# EAGLE board MegaShieldDB (EAGLE 6.4)
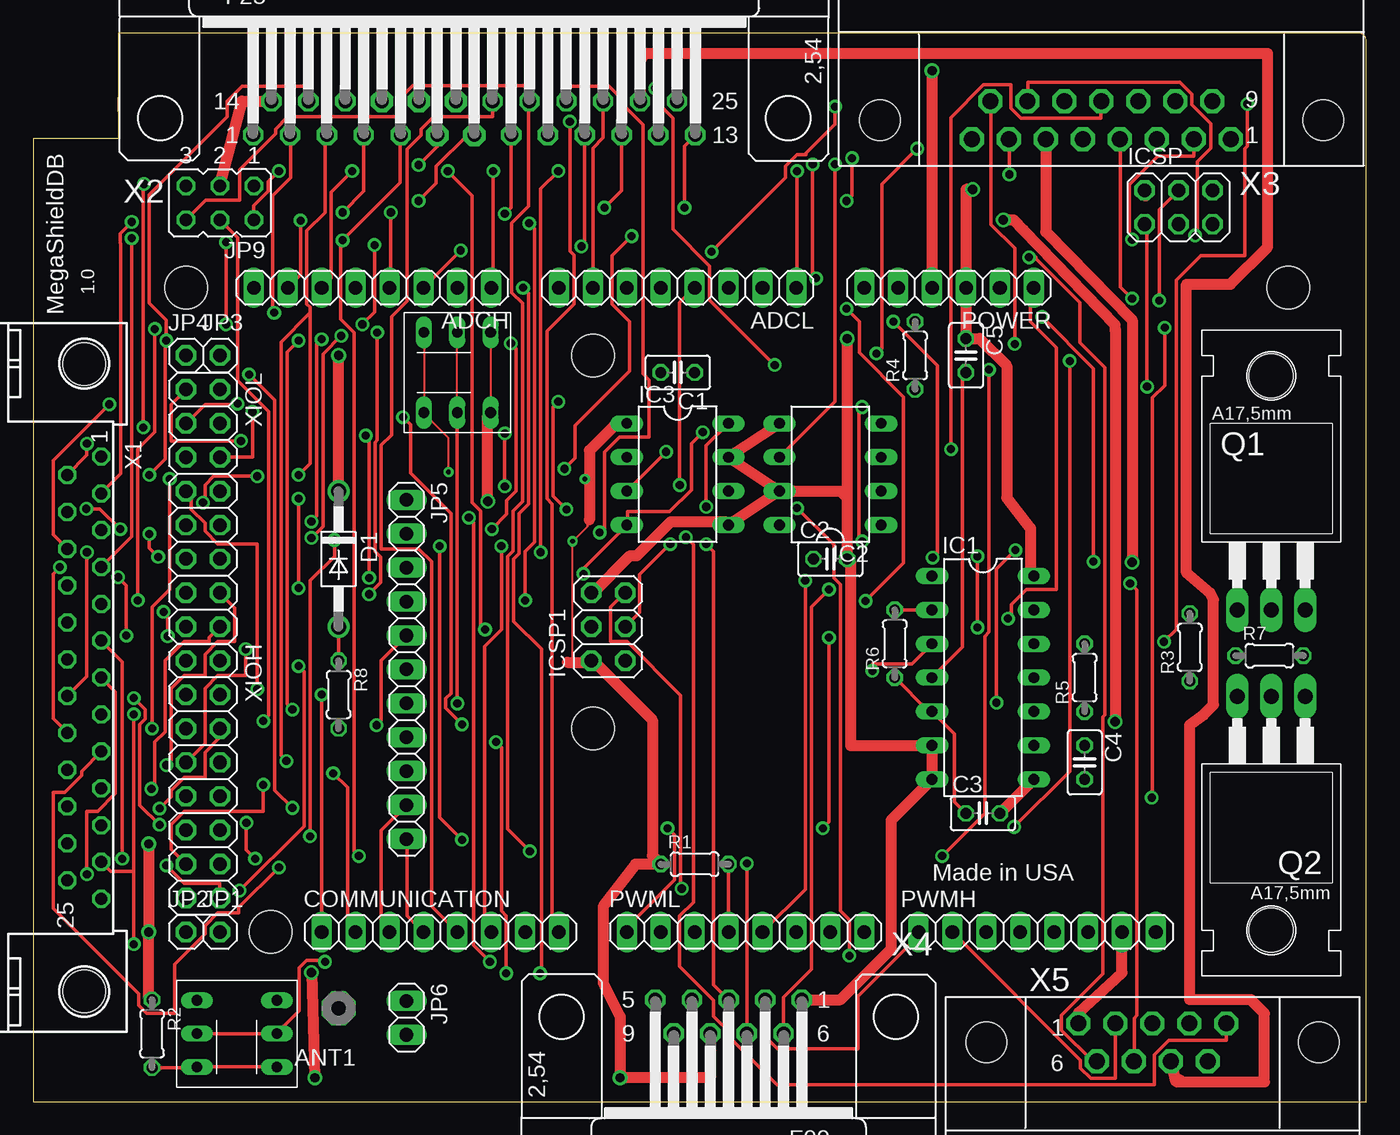
[diagram p0: board, top side]
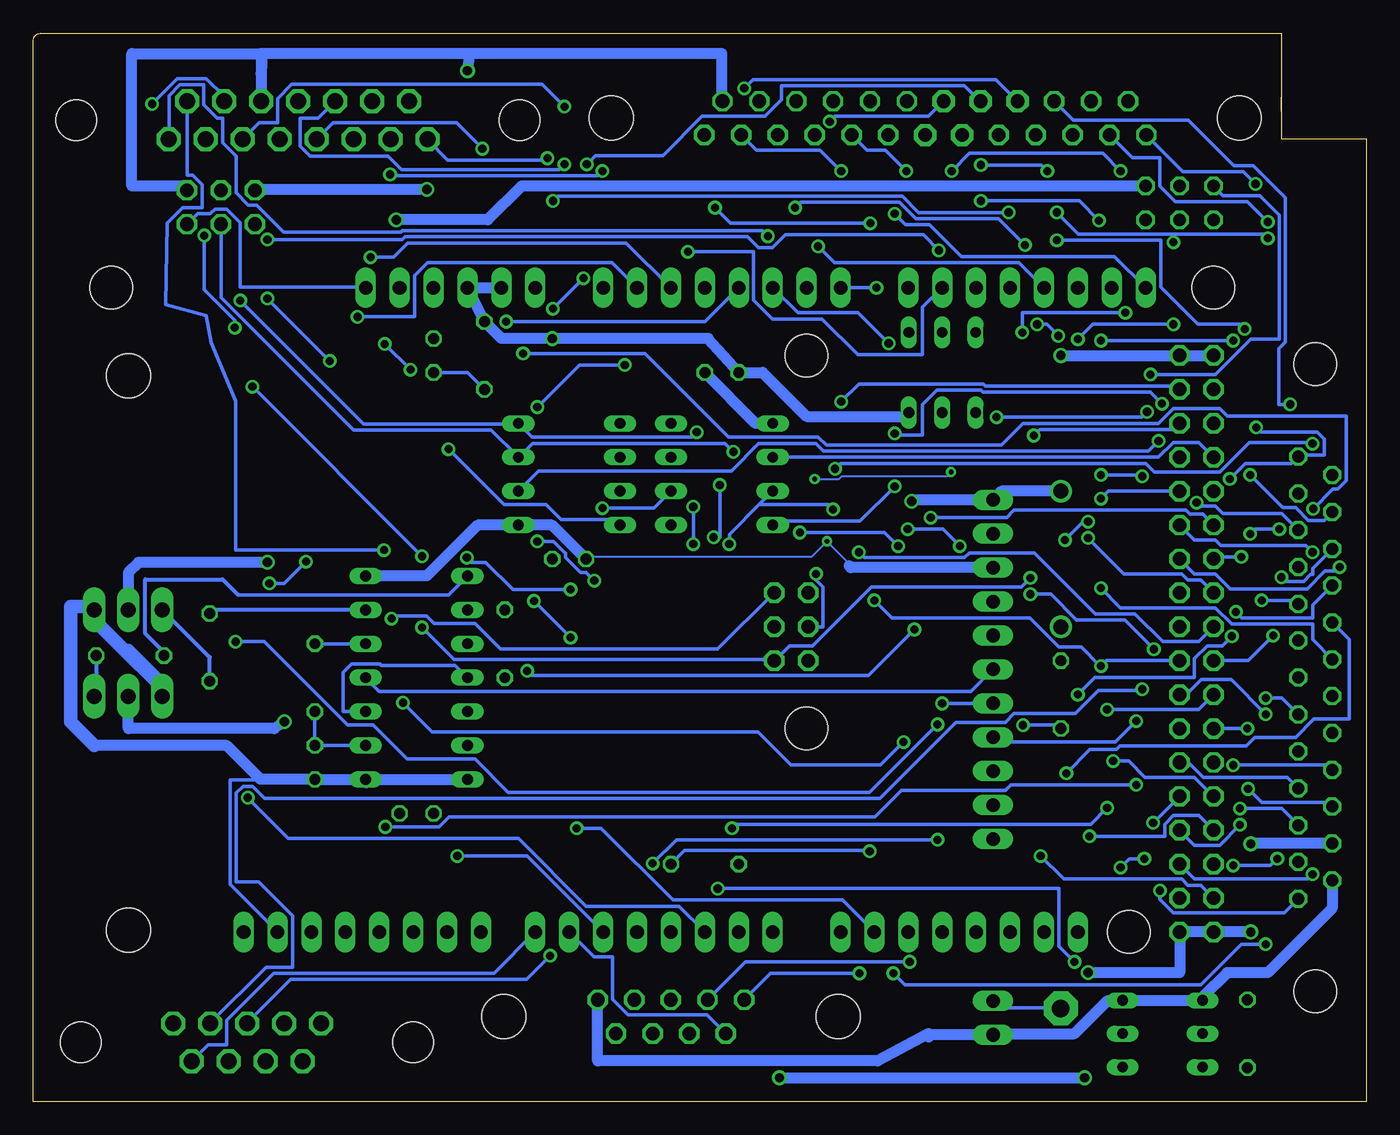
[diagram p1: board, bottom side, seen from below]

Size 99.82 x 80.01 mm. Coordinates in mm from the lower left corner, seen from the top.
Outline: 6.35,74.17 6.35,75.18
Outline: 6.35,80.01 6.35,72.14 0,72.14 0,0 99.82,0 99.82,79.5 arc90 99.31,80.01 6.35,80.01
Copper layers (1*16): Top 0.0178mm / dielectric 59mil / Bottom 0.0178mm
Design rules "SSC-EAGLE-2Lyr_v1.0.0.3": minimum track width 6mil, minimum drill 14mil, track to track 6mil, track to pad 6mil, pad to pad 6mil, via to via 6mil, smd to smd 6mil, copper to edge 20mil, drill to drill 16mil, minimum pad ring 8mil, minimum via ring 8mil, stop-mask expansion 3mil, vias tented up to drill 0mil, thermal gap 10mil
Net classes: 0 default: width 0.152 mm, drill 0.305 mm, clearance 0.152 mm
Holes 3.2 mm at 11.43,60.96 17.78,12.7 41.91,27.94 41.91,55.88 93.98,60.96 3.81,55.24 3.81,8.26

## Footprints (pad centres in the part's own frame; a part is rotated, then mirrored left to right if it is on the bottom)
1X08 = drill 1.016 long: 1 -8.89,0; 2 -6.35,0; 3 -3.81,0; 4 -1.27,0; 5 1.27,0; 6 3.81,0; 7 6.35,0; 8 8.89,0
PAD-01 = drill 1.321 pad 2.54 octagon: 1 0,0
C025-025X050 = drill 0.813 octagon: 1 -1.27,0; 2 1.27,0
DO41-10 = drill 1.118: A 5.08,0; C -5.08,0
DIL14 = drill 0.813 long: 1 -7.62,-3.81; 2 -5.08,-3.81; 3 -2.54,-3.81; 4 0,-3.81; 5 2.54,-3.81; 6 5.08,-3.81; 7 7.62,-3.81; 8 7.62,3.81; 9 5.08,3.81; 10 2.54,3.81; 11 0,3.81; 12 -2.54,3.81; 13 -5.08,3.81; 14 -7.62,3.81
DIL08 = drill 0.813 long: 1 -3.81,-3.81; 2 -1.27,-3.81; 3 1.27,-3.81; 4 3.81,-3.81; 5 3.81,3.81; 6 1.27,3.81; 7 -1.27,3.81; 8 -3.81,3.81
2X03 = drill 1.016 octagon: 1 -2.54,-1.27; 2 -2.54,1.27; 3 0,-1.27; 4 0,1.27; 5 2.54,-1.27; 6 2.54,1.27
1X01 = drill 1.016 octagon: 1 0,0
1X11 = drill 1.016 long: 1 -12.7,0; 2 -10.16,0; 3 -7.62,0; 4 -5.08,0; 5 -2.54,0; 6 0,0; 7 2.54,0; 8 5.08,0; 9 7.62,0; 10 10.16,0; 11 12.7,0
1X02 = drill 1.016 long: 1 -1.27,0; 2 1.27,0
JP3Q = drill 0.914 octagon: 1 -2.54,-1.27; 2 -2.54,1.27; 3 0,-1.27; 4 0,1.27; 5 2.54,-1.27; 6 2.54,1.27
1X06 = drill 1.016 long: 1 -6.35,0; 2 -3.81,0; 3 -1.27,0; 4 1.27,0; 5 3.81,0; 6 6.35,0
TO220 = drill 1.118 long: 1 -2.54,-6.35; 2 0,-6.35; 3 2.54,-6.35 | hole 3.302: 0,11.176
0204/5 = drill 0.813 octagon: 1 -2.54,0; 2 2.54,0
NEWSWITCH2_PAC = drill 0.8 long: PIN1 -2.5,3; PIN2 0,3; PIN3 2.5,3; PIN4 -2.5,-3; PIN5 0,-3; PIN6 2.5,-3
M25-HD-20 = drill 0.9 pad 1.3 octagon: 1 -16.561,1.27; 2 -13.792,1.27; 3 -11.049,1.27; 4 -8.28,1.27; 5 -5.512,1.27; 6 -2.769,1.27; 7 0,1.27; 8 2.769,1.27; 9 5.512,1.27; 10 8.28,1.27; 11 11.049,1.27; 12 13.792,1.27; 13 16.561,1.27; 14 -15.189,-1.27; 15 -12.421,-1.27; 16 -9.652,-1.27; 17 -6.909,-1.27; 18 -4.14,-1.27; 19 -1.372,-1.27; 20 1.372,-1.27; 21 4.14,-1.27; 22 6.909,-1.27; 23 9.652,-1.27; 24 12.421,-1.27; 25 15.189,-1.27
F25H = drill 1.016 octagon: 1 -16.561,-1.27; 2 -13.792,-1.27; 3 -11.049,-1.27; 4 -8.28,-1.27; 5 -5.512,-1.27; 8 2.769,-1.27; 9 5.512,-1.27; 10 8.28,-1.27; 11 11.049,-1.27; 12 13.792,-1.27; 13 16.561,-1.27; 14 -15.189,1.27; 15 -12.421,1.27; 16 -9.652,1.27; 20 1.372,1.27; 21 4.14,1.27; 22 6.909,1.27; 23 9.652,1.27; 24 12.421,1.27; 25 15.189,1.27 | drill 1.016 pad 1.67 octagon: 6 -2.769,-1.27; 7 0,-1.27; 17 -6.909,1.27; 18 -4.14,1.27; 19 -1.372,1.27 | hole 3.302: -23.52,0; 23.52,0
182-015-MALE = drill 1.194 pad 1.524 octagon: 1 -9.69,10.923; 2 -6.921,10.923; 3 -4.153,10.923; 4 -1.384,10.923; 5 1.384,10.923; 6 4.153,10.923; 7 6.921,10.923; 8 9.69,10.923; 9 -8.306,8.08; 10 -5.537,8.08; 11 -2.769,8.08; 12 0,8.08; 13 2.769,8.08; 14 5.537,8.08; 15 8.306,8.08 | hole 3.048: -16.599,9.501; 16.599,9.501
F09H = drill 1.016 octagon: 1 -5.486,-1.27; 2 -2.743,-1.27; 3 0,-1.27; 4 2.743,-1.27; 5 5.486,-1.27; 6 -4.115,1.27; 7 -1.372,1.27; 8 1.372,1.27; 9 4.115,1.27 | hole 3.302: -12.522,0; 12.522,0
182-009-MALE = drill 1.194 pad 1.524 octagon: 1 -5.537,10.923; 2 -2.769,10.923; 3 0,10.923; 4 2.769,10.923; 5 5.537,10.923; 6 -4.153,8.08; 7 -1.384,8.08; 8 1.384,8.08; 9 4.153,8.08 | hole 3.048: -12.446,9.501; 12.446,9.501
2X08 = drill 1.016 octagon: 1 -8.89,-1.27; 2 -8.89,1.27; 3 -6.35,-1.27; 4 -6.35,1.27; 5 -3.81,-1.27; 6 -3.81,1.27; 7 -1.27,-1.27; 8 -1.27,1.27; 9 1.27,-1.27; 10 1.27,1.27; 11 3.81,-1.27; 12 3.81,1.27; 13 6.35,-1.27; 14 6.35,1.27; 15 8.89,-1.27; 16 8.89,1.27

## Placement (x,y rotation side)
ADCH  Analog In 8-15  [1X08]  25.4,60.96 180 top
ADCL  Analog In 0-7  [1X08]  48.26,60.96 180 top
ANT1  170 mm  [PAD-01]  22.87,6.97 180 top
C1  0.1uF  [C025-025X050]  48.26,54.61 180 top
C2  0.1uF  [C025-025X050]  59.69,40.64 0 top
C3  0.1uF  [C025-025X050]  71.12,21.59 0 top
C4  0.1 uF  [C025-025X050]  78.74,25.4 270 top
C5  0.1uF  [C025-025X050]  69.85,55.88 270 top
COMMUNICATION  Digital 14-21  [1X08]  30.48,12.7 0 top
D1  1N4004  [DO41-10]  22.86,40.64 270 top
IC1  4013N  [DIL14]  71.12,31.75 270 top
IC2  MCP4802  [DIL08]  59.69,46.99 90 top
IC3  MCP4802  [DIL08]  48.26,46.99 270 top
ICSP  ICSP  [2X03]  85.77,66.99 0 top
ICSP1  ICSP  [2X03]  43.05,35.56 90 top
JP1  5V  [1X01]  13.97,12.7 0 top
JP2  5V  [1X01]  11.43,12.7 0 top
JP3  GND  [1X01]  13.97,55.88 0 top
JP4  GND  [1X01]  11.43,55.88 0 top
JP5  Receiver  [1X11]  27.95,32.37 270 top
JP6  Receiver  [1X02]  27.95,6.27 270 top
JP9  Wireless Select  [JP3Q]  13.97,67.31 180 top
POWER  POWER  [1X06]  68.58,60.96 180 top
PWMH  Digital 8-13  [1X08]  75.18,12.7 0 top
PWML  Digital 0-7  [1X08]  53.34,12.7 0 top
Q1  TIP3055  [TO220]  92.71,43.18 0 top
Q2  TIP3055  [TO220]  92.71,24 180 top
R1  1M  [0204/5]  49.53,17.78 0 top
R2  10M  [0204/5]  8.89,5.08 270 top
R3  1.5k  [0204/5]  86.61,34.02 90 top
R4  1M  [0204/5]  66.04,55.88 90 top
R5  10M  [0204/5]  78.74,31.75 90 top
R6  10M  [0204/5]  64.52,34.29 90 top
R7  1.5k  [0204/5]  92.58,33.4 0 top
R8  10M  [0204/5]  22.86,30.48 270 top
U$1  DPDT_DEV6X5MM_PAC  [NEWSWITCH2_PAC]  15.24,5.08 90 top
U$2  DPDT_DEV6X5MM_PAC  [NEWSWITCH2_PAC]  31.75,54.61 0 top
X1  Panel  [M25-HD-20]  3.81,31.75 270 top
X2  Cruise  [F25H]  33.02,73.66 0 top
X3  Motor  [182-015-MALE]  80,83 180 top
X4  Steer  [F09H]  52.07,6.35 180 top
X5  Brake  [182-009-MALE]  83.82,-5.08 0 top
XIOH  Digital 22-37  [2X08]  12.7,24.13 270 top
XIOL  Digital 38-53  [2X08]  12.7,44.45 270 top

## Library data of the parts
ADCH ADCL COMMUNICATION ICSP ICSP1 JP1-JP6 POWER PWMH PWML XIOH XIOL = pinhead
ANT1 = discrete
C1-C5 R1-R8 = rcl
D1 = diode
IC1-IC3 = ic-package
JP9 = jumper
Q1 Q2 = transistor-neu-to92
U$1 U$2 = elcanoParts
X1-X5 = con-subd; OC_FARNELL: unknown; OC_NEWARK: unknown

## Nets
5VBRK: X2.24 X5.8
+5V: C1.1 C2.1 C5.1 IC1.14 IC2.1 IC3.1 ICSP1.2 ICSP.2 JP1.1 JP2.1 JP5.3 POWER.3 R1.1 R2.1 U$2.PIN1 U$2.PIN4 X1.24 X4.8
A0: ADCL.1 X3.7
A1: ADCL.2 X5.7
A4: ADCL.5 X4.6
A5: ADCL.6 X4.7
A6: ADCL.7 X2.23
A7: ADCL.8 X4.5
A9: ADCH.2 X3.3
A10: ADCH.3 X3.2
A11: ADCH.4 X3.8
A12: ADCH.5 X2.10
A13: ADCH.6 X2.6
A14: ADCH.7 X2.7
A15: ADCH.8 X2.8
CLKA: IC1.3 JP9.2
CLKB: IC1.11 JP5.6
D0RX0: JP9.5 PWML.1
D2INT0: PWML.3 X3.14
D3INT1: JP9.6 PWML.4 R1.2 X2.21
D4: PWML.5 X2.17
D5: PWML.6 X3.15
D6: PWML.7 X4.9
D7: PWML.8 X5.9
D8: PWMH.1 X4.2
D9: PWMH.2 X5.2
D14TXD3: COMMUNICATION.8 X2.19
D15RXD3: COMMUNICATION.7 X2.18
D16TXD2: COMMUNICATION.6 X2.22
D17RXD2: COMMUNICATION.5 X2.20
D18INT2: COMMUNICATION.4 JP5.11
D19INT3: COMMUNICATION.3 JP5.10
D20INT4: COMMUNICATION.2 X1.18
D21INT5: COMMUNICATION.1 X1.17
D22: X1.6 XIOH.16
D23: X1.5 X2.5 XIOH.15
D24: X1.7 XIOH.14
D25: X3.4 XIOH.13
D26: X1.8 XIOH.12
D27: X1.4 X2.4 XIOH.11
D28: X1.9 XIOH.10
D29: X1.3 X2.3 XIOH.9
D30: X1.10 XIOH.8
D31: X1.2 X2.2 XIOH.7
D32: X1.11 XIOH.6
D33: X1.1 X2.1 XIOH.5
D34: X1.12 X3.9 XIOH.4
D35: X1.15 X2.15 XIOH.3
D36: X1.13 X2.13 XIOH.2
D37: X1.16 X2.16 XIOH.1
D38: X1.23 XIOL.16
D39: X2.12 XIOL.15
D40: X1.22 XIOL.14
D41: X2.11 XIOL.13
D42: X1.21 XIOL.12
D43: X3.5 XIOL.11
D44: X1.20 XIOL.10
D45: X4.4 XIOL.9
D46: X1.19 XIOL.8
D47: X5.4 XIOL.7
D48: X3.10 XIOL.6
D49: IC3.2 XIOL.5
D51: IC2.4 IC3.4 ICSP1.4 ICSP.4 XIOL.3
D52: IC2.3 IC3.3 ICSP1.3 ICSP.3 XIOL.2
D53: IC2.2 XIOL.1
DA: C3.1 IC1.5 R6.1
DACA: IC2.8 X3.12
DACB: IC2.6 X3.13
DACC: IC3.8 X4.3
DACD: IC3.6 X5.3
DB: C4.1 IC1.9 R5.1
FUEL: X1.14 X3.1
GND: C1.2 C2.2 C3.2 C4.2 D1.C IC1.6 IC1.7 IC1.8 IC2.5 IC2.7 IC3.5 IC3.7 ICSP1.6 ICSP.6 JP3.1 JP4.1 JP5.1 JP6.2 POWER.4 POWER.5 PWMH.7 Q1.3 Q2.3 R4.2 U$1.PIN3 U$1.PIN6 U$2.PIN3 U$2.PIN6 X1.25 X2.25 X3.11 X4.1 X5.1
N$1: ADCL.3 X5.6
N$2: IC1.1 R7.1
N$3: Q2.1 R7.2
N$4: IC1.13 R3.2
N$5: ADCH.1 X2.9
N$6: R2.2 U$1.PIN1 U$1.PIN4
N$7: IC1.2 R6.2
N$8: ADCL.4 X5.5
N$9: ICSP1.1 ICSP.1 XIOL.4
N$26: ANT1.1 JP6.1
N$28: JP5.7 U$2.PIN2 U$2.PIN5
N$33: Q1.1 R3.1
N$40: D1.A R8.1
RA: C5.2 IC1.4 IC1.10 R4.1
RCVR5: JP5.5 R8.2
RESET: ICSP1.5 ICSP.5 POWER.1 U$1.PIN2 U$1.PIN5
WL2: JP5.8 JP9.4
WLES: Q1.2 X3.6
WLXCOLL: JP9.1 Q2.2
X2-14: JP9.3 X2.14
~QB: IC1.12 R5.2

## Tracks (layer width: path | path; a pad name or v marks a point on that pad's centre or on a via)
5VBRK
  Top 0.813: X5.8 85.53,1.52 86.04,1.46 85.92,1.59 85.66,1.71 85.66,1.46 92.2,1.46 92.2,6.6 91.19,7.62 86.61,7.62 86.61,28.19 87.63,28.96 88.39,29.72 88.39,37.59 88.14,38.1 86.36,39.62 86.36,61.21 89.66,61.21 92.46,64.01 92.46,78.49 45.72,78.49 45.44,77.95 X2.24
+5V  (via drill 0.36, 0.7)
  Top 0.152: U$2.PIN1 29.26,57.51 29.26,51.71 U$2.PIN4 29.36,51.41 31.09,49.68 v31.09,47.14 | v41.3,46.63 41.66,46.63 | 41.66,43.56 41.5,43.18 41.5,43.08 v40.39,41.96 40.39,32.89
  Top 0.254: 83.23,67.9 83.26,68.22 ICSP.2 | U$2.PIN4 29.31,51.51 | U$2.PIN1
  Top 0.813: 40.01,32.89 40.39,32.89 41.78,32.89 ICSP1.2 41.91,33.02 46.35,28.57 46.35,18.41 R1.1 45.09,17.78 42.67,14.61 42.67,8.89 43.94,6.35 v43.94,1.78 50.7,1.78 X4.8 | v8.64,19.3 v8.64,12.7 8.64,7.87 arc90 R2.1 | v20.83,9.65 v21.08,1.78 | IC1.14 74.68,39.62 74.68,42.93 72.9,45.21 72.9,55.12 70.87,57.15 C5.1 POWER.3 69.85,68.33 v70.36,68.33 | IC3.1 43.69,50.8 41.66,48.77 41.66,46.63 41.66,43.56 | 83.23,67.9 83.31,67.82
  Bottom 0.152: v31.09,47.14 31.39,46.84 39.27,46.84 39.47,46.63 v41.3,46.63 | 38.73,40.13 38.91,40.49 v40.39,41.96 41.5,40.84 58.06,40.84 C2.1
  Bottom 0.254: ICSP.2 83.26,68.28 83.26,68.33
  Bottom 0.813: v8.64,12.7 JP2.1 JP1.1 13.97,9.65 v20.83,9.65 | JP5.3 38.59,39.99 38.73,40.13 | X1.24 8.61,19.33 v8.64,19.3 | v43.94,1.78 v21.08,1.78 | C2.1 60.96,43.18 IC2.1 66.55,43.18 70.36,39.37 IC1.14 | IC3.1 45.72,50.8 C1.1 | 83.31,68.33 83.26,68.33 v70.36,68.33
A0  (via drill 0.61)
  Top 0.254: ADCL.1 57.2,61.01 v57.2,69.7 | v73.1,69.44 73.1,72.03 X3.7
  Bottom 0.254: v57.2,69.7 57.56,69.34 73,69.34 v73.1,69.44
A1  (via drill 0.61)
  Top 0.254: v75.54,58.78 79.4,54.91 v79.4,40.44 | v82.14,38.81 82.65,38.3 82.65,6.45 82.45,6.25 82.45,3.05 X5.7
  Bottom 0.254: ADCL.2 56.49,62.84 70.31,62.84 71.27,61.87 71.27,58.78 v75.54,58.78 | v79.4,40.44 81.03,38.81 v82.14,38.81
A4  (via drill 0.61)
  Top 0.254: v64.41,58.42 67.72,55.12 67.72,41.1 v67.36,40.74 | v59.59,38.35 58.27,37.03 58.27,9.91 56.19,7.82 X4.6
  Bottom 0.254: ADCL.5 49.53,58.42 v64.41,58.42 | v67.36,40.74 67,40.39 65.94,40.39 63.91,38.35 v59.59,38.35
A5  (via drill 0.61)
  Top 0.254: v53.44,17.83 X4.7 | v32.11,19.61 30.43,21.29 v30.43,41.6 | v34.34,42.88 35.46,43.99 35.46,45.01 36.17,45.72 36.17,56.39 v35.76,56.79
  Bottom 0.254: v53.44,17.83 51.66,19.61 v32.11,19.61 | v30.43,41.6 31.7,42.88 v34.34,42.88 | v35.76,56.79 38.05,59.08 42.57,59.08 ADCL.6
A6
  Top 0.254: ADCL.7 41.91,71.42 42.67,72.19 X2.23
A7  (via drill 0.61)
  Top 0.254: v37.95,9.6 38.05,9.7 38.05,33.88 35.97,35.97 35.97,40.64 36.37,41.05 36.37,44.04 37.08,44.76 37.08,60.55 v36.68,60.96
  Bottom 0.254: X4.5 44.6,9.6 v37.95,9.6 | ADCL.8 v36.68,60.96
A9  (via drill 0.61)
  Top 0.254: v50.8,63.65 56.34,69.19 56.34,70.05 57.2,70.92 57.86,70.92 57.86,71.02 60.05,73.2 v60.05,74.52
  Bottom 0.254: ADCH.2 33.22,59.49 33.22,55.93 38.05,55.93 40.74,58.62 44.45,58.62 45.87,60.05 45.87,63.65 v50.8,63.65 | v60.05,74.52 61.72,76.2 80.47,76.2 81.53,75.13 81.53,73.3 82.91,73.3 84.12,72.08 X3.3
A10  (via drill 0.61)
  Top 0.254: v32,63.75 ADCH.3 | v82.3,64.57 82.09,64.77 82.09,68.68 84.23,70.81 86.92,70.81 86.92,72.03 X3.2
  Bottom 0.254: v32,63.75 33.17,64.92 43.48,64.92 44.45,63.96 45.52,63.96 46.33,64.77 71.98,64.77 72.19,64.57 v82.3,64.57
A11  (via drill 0.61)
  Top 0.254: ADCH.4 26.77,61.06 v26.77,66.6 | v60.91,67.46 61.32,67.87 v61.32,70.66
  Bottom 0.254: v26.77,66.6 33.53,66.6 34.75,67.82 60.55,67.82 v60.91,67.46 | v61.32,70.66 61.47,70.51 68.78,70.51 70.31,72.03 X3.8
A12  (via drill 0.61)
  Top 0.254: v41.05,64.06 41.3,64.31 X2.10
  Bottom 0.254: ADCH.5 26.01,62.84 39.83,62.84 v41.05,64.06
A13  (via drill 0.61)
  Top 0.254: ADCH.6 22.3,61.67 22.3,68.12 v23.88,69.7 | v28.85,70.16 30.23,71.53 30.23,72.39 X2.6
  Bottom 0.254: v23.88,69.7 24.33,70.16 v28.85,70.16
A14  (via drill 0.61)
  Top 0.254: ADCH.7 20.02,61.92 v20.02,65.99 | v28.85,67.46 30.18,68.78 30.18,70.05 32.51,72.39 X2.7
  Bottom 0.254: v20.02,65.99 21.49,67.46 v28.85,67.46
A15  (via drill 0.61)
  Top 0.254: v35.31,66.5 35.76,66.95 35.76,72.39 X2.8
  Bottom 0.254: ADCH.8 18.85,63.3 30.33,63.3 32.72,65.68 34.49,65.68 v35.31,66.5
CLKA  (via drill 0.61)
  Top 0.254: IC1.3 65.79,32.77 62.84,32.77 v62.84,32.26 | v33.83,35.36 33.48,35.71 33.48,44.25 32.87,44.86 32.87,67.87 v31.04,69.7 | v18.39,69.7 17.58,68.89 17.58,68.17 16.51,67.11 JP9.2
  Bottom 0.254: v62.84,32.26 62.48,31.9 37.29,31.9 v33.83,35.36 | v31.04,69.7 29.72,71.02 19.71,71.02 v18.39,69.7
CLKB
  Bottom 0.254: IC1.11 73.91,30.73 29.62,30.73 27.99,32.36 JP5.6
D0RX0  (via drill 0.61)
  Top 0.254: v16.15,54.46 18.09,52.53 18.09,23.32 v19.41,22 | v47.5,20.47 48.01,19.96 48.01,16.61 44.45,13.06 PWML.1
  Bottom 0.254: JP9.5 10.72,67.87 7.98,67.87 6.5,66.4 6.5,57.1 8.64,57.1 11.28,54.46 v16.15,54.46 | v19.41,22 20.62,20.78 47.19,20.78 v47.5,20.47
D2INT0  (via drill 0.61)
  Top 0.254: v83.77,22.76 83.82,22.81 83.82,52.73 84.73,53.65 v84.73,57.96 | v87.02,64.87 87.17,65.02 87.17,70.41 88.19,71.42 88.19,73.25 86.77,74.68 86.77,75.44 85.85,76.35 74.47,76.35 74.47,74.93 X3.14
  Bottom 0.254: PWML.3 51.46,14.63 58.42,14.63 63.5,19.71 80.72,19.71 v83.77,22.76 | v84.73,57.96 84.73,58.52 87.02,60.81 v87.02,64.87
D3INT1  (via drill 0.61)
  Top 0.254: PWML.4 R1.2 | JP9.6 12.9,67.51 15.44,67.51 15.44,69.8 18.14,72.49 18.14,72.85 19.05,73.76 27.69,73.76 27.69,75.39 28.4,76.1 37.13,76.1 37.13,74.93 X2.21 37.08,74.83 37.08,67.06 35.81,65.79 35.81,60.6 36.63,59.79 36.63,44.96 35.92,44.25 35.92,41.25 35.51,40.84 35.51,20.42 v37.19,18.75
  Bottom 0.254: R1.2 51.05,18.8 37.24,18.8 v37.19,18.75
D4  (via drill 0.61)
  Top 0.254: PWML.5 57.81,15.9 v57.81,39.01 | v62.08,41.96 61.82,42.22 61.82,51.77 v62.08,52.02 | v55.52,55.17 50.65,60.05 50.65,62.59 47.9,65.33 47.9,73.66 46.58,74.98 v46.58,75.89
  Bottom 0.254: v57.81,39.01 58.42,39.62 58.83,39.62 59.94,40.74 59.94,41.1 59.99,41.1 60.86,41.96 v62.08,41.96 | v62.08,52.02 58.93,55.17 v55.52,55.17 | v46.58,75.89 45.92,76.56 27.74,76.56 X2.17
D5  (via drill 0.61)
  Top 0.254: v68.07,18.39 71.27,21.59 71.27,34.85 71.58,35.15 v71.58,54.81 | v73.51,56.74 73.51,63.91 71.73,65.68 71.73,74.88 X3.15
  Bottom 0.254: PWML.6 62.84,18.39 v68.07,18.39 | v73.51,56.74 v71.58,54.81
D6
  Bottom 0.254: X4.9 49.38,6.5 55.27,6.5 56.44,7.67 56.44,10.82 57.81,10.82 PWML.7
D7
  Bottom 0.254: PWML.8 65.33,9.6 81.84,9.6 85.34,6.1 85.34,4.27 86.72,4.27 87.94,3.05 X5.9
D8
  Top 0.254: X4.2 55.07,7.37 55.07,4.62 55.73,3.96 61.77,3.96 61.77,7.87 66.29,12.39 PWMH.1
D9
  Top 0.254: PWMH.2 78.44,3.1 78.44,2.49 79.2,1.73 81.03,1.73 81.03,5.84 X5.2
D14TXD3  (via drill 0.61)
  Top 0.254: COMMUNICATION.8 38.86,13.21 38.86,44.76 38.46,45.16 38.46,57.71 40.49,59.74 40.49,63.4 40.18,63.7 v40.18,73.41
  Bottom 0.254: v40.18,73.41 39.78,73.81 32.77,73.81 X2.19
D15RXD3  (via drill 0.61)
  Top 0.254: v59.13,20.47 59.59,20.93 v59.59,34.75 | v62.33,37.49 65.18,40.34 65.18,52.78 61.87,56.08 61.87,58.42 v60.91,59.38 | v58.62,61.67 58.37,61.92 v58.37,70.21
  Bottom 0.254: COMMUNICATION.7 39.22,15.09 51.92,15.09 57.3,20.47 v59.13,20.47 | v62.33,37.49 v59.59,34.75 | v58.62,61.67 v60.91,59.38 | v58.37,70.21 57.71,70.87 52.68,70.87 49.73,73.81 45.01,73.81 43.79,75.03 43.79,76.1 30.07,76.1 28.91,74.93 X2.18
D16TXD2  (via drill 0.61)
  Top 0.254: COMMUNICATION.6 33.78,13.21 33.78,34.09 35.05,35.36 v35.05,41.6 | v42.42,42.62 42.77,42.98 42.77,48.67 43.89,49.78 46.13,49.78 46.13,54.05 45.67,54.51 45.67,73.15 43.79,75.03 43.79,75.39 43.13,76.05 39.93,76.05 X2.22
  Bottom 0.254: v35.05,41.6 36.07,42.62 v42.42,42.62
D17RXD2
  Top 0.254: COMMUNICATION.5 29.82,14.63 29.82,40.44 28.85,41.4 26.06,41.4 26.06,49.17 26.82,49.94 26.82,58.78 27.99,59.94 27.99,71.32 29.06,72.39 29.06,72.85 29.97,73.76 34.39,73.76 X2.20
D18INT2
  Top 0.254: COMMUNICATION.4 27.99,13.92 27.99,19.66 JP5.11
D19INT3
  Top 0.254: COMMUNICATION.3 26.06,13.31 26.06,20.32 JP5.10
D20INT4  (via drill 0.61)
  Top 0.254: v22.45,24.59 23.52,23.52 23.52,13.31 COMMUNICATION.2
  Bottom 0.254: v22.45,24.59 20.68,26.36 18.69,26.36 18.44,26.62 8.99,26.62 8.33,27.28 5.28,27.28 3.91,28.65 1.27,28.65 1.27,34.59 2.54,35.87 X1.18
D21INT5  (via drill 0.61)
  Top 0.254: v9.75,36.68 10.06,36.37 v10.06,34.85 | COMMUNICATION.1 v21.59,30.48
  Bottom 0.254: X1.17 4.01,37.19 4.01,36.22 9.3,36.22 v9.75,36.68 | v10.06,34.85 10.77,34.14 11.89,34.14 12.85,33.17 12.85,31.75 20.32,31.75 v21.59,30.48
D22  (via drill 0.61)
  Top 0.254: v6.66,18.19 6.66,32.92 5.08,34.49 X1.6 | v9.96,17.68 11.28,16.36 13.97,16.36 XIOH.16
  Bottom 0.254: v6.66,18.19 7.16,17.68 v9.96,17.68
D23  (via drill 0.61)
  Top 0.254: v7.82,37.54 7.82,48.87 9.09,50.14 v9.09,57.86 | X2.5 27.48,72.39 27.48,68.83 v23.16,64.52 23.11,64.41 23.01,64.31 23.01,58.62 24.03,57.61 24.03,18.75 v24.38,18.39
  Bottom 0.254: v7.82,37.54 5.33,37.54 5.08,37.29 X1.5 | v9.09,57.86 9.45,58.22 12.6,58.22 15.39,61.01 15.39,64.52 v23.16,64.52 | XIOH.15 12.39,16.2 13.36,16.2 13.82,16.66 22.66,16.66 v24.38,18.39
D24  (via drill 0.61)
  Top 0.254: X1.7 6.15,30.68 6.15,23.06 4.83,21.74 4.01,21.74 v4.01,17.02
  Bottom 0.254: v4.01,17.02 4.37,16.66 12.85,16.66 XIOH.14
D25  (via drill 0.61)
  Top 0.254: XIOH.13 10.31,18.9 10.31,20.78 11.28,21.74 17.22,21.74 v17.22,23.72 | v73.46,20.57 77.62,24.74 v77.62,55.47 | v82.3,60.15 81.43,61.01 81.43,72.03 X3.4
  Bottom 0.254: v17.22,23.72 26.62,23.72 27.03,23.32 34.8,23.32 36.78,21.34 68.68,21.34 69.44,20.57 v73.46,20.57 | v82.3,60.15 v77.62,55.47
D26  (via drill 0.61)
  Top 0.254: v7.52,30.23 8.38,29.36 8.38,28.65 7.98,28.25 7.98,22.2 v9.45,20.73
  Bottom 0.254: v7.52,30.23 6.3,30.23 5.08,29.01 X1.8 | v9.45,20.73 10.97,19.2 12.85,19.2 XIOH.12
D27  (via drill 0.61)
  Top 0.254: X1.4 7.37,42.32 v7.37,64.67 | v23.16,66.6 24.74,68.17 X2.4 | v20.73,19.86 20.73,39.01 22.55,40.84 v22.55,42.06 | v20.83,43.43 21.23,43.84 21.23,56.74 v21.59,57.1 | v14.43,64.36 v14.43,58.22
  Bottom 0.254: v7.37,64.67 7.67,64.97 14.43,64.97 | 14.43,64.97 21.54,64.97 v23.16,66.6 | XIOH.11 12.55,21.44 14.43,21.44 15.09,20.78 15.09,19.86 v20.73,19.86 | v22.55,42.06 21.18,43.43 v20.83,43.43 | v21.59,57.1 20.47,58.22 v14.43,58.22 | 14.43,64.97 v14.43,64.36
D28  (via drill 0.61)
  Top 0.254: v18.39,17.53 15.39,14.53 15.39,14.12 13.82,14.12 12.85,13.16 12.85,12.55 10.57,10.26 10.57,6.6 8.48,6.6 7.87,7.21 7.87,8.08 1.47,14.48 1.47,23.16 2.34,23.16 3.61,24.43 3.61,24.74 5.08,26.21 X1.9 | v16.61,18.19 15.95,18.85 v15.95,20.88
  Bottom 0.254: v18.39,17.53 17.73,18.19 v16.61,18.19 | XIOH.10 v15.95,20.88
D29  (via drill 0.61)
  Top 0.254: v12.7,44.86 12.85,45.01 12.85,46.18 13.51,46.84 v16.76,46.84 | v19.86,46.94 20.73,47.8 20.73,58.98 | 20.73,58.98 20.73,59.49 20.47,59.74 20.47,65.23 21.84,66.6 21.84,72.29 21.95,72.39 X2.3 | v18.95,25.5 18.54,25.91 18.54,56.9 20.62,58.98 20.73,58.98
  Bottom 0.254: v12.7,44.86 12.45,44.6 11.28,44.6 10.72,44.04 6.3,44.04 5.08,42.82 X1.3 | v16.76,46.84 16.87,46.94 v19.86,46.94 | XIOH.9 12.85,24.28 16.56,24.28 17.78,25.5 v18.95,25.5
D30
  Bottom 0.254: X1.10 5.89,24.28 12.19,24.28 13.31,25.4 XIOH.8
D31  (via drill 0.61)
  Top 0.254: v7.37,65.89 6.5,65.02 6.5,64.31 6.55,64.26 6.55,47.04 5.08,45.57 X1.2 | XIOH.7 12.85,26.82 12.85,30.94 13.82,31.9 15.9,31.9 v15.9,33.88 | v25.15,38 26.01,38.86 26.01,40.79 25.6,41.2 25.6,49.38 25.76,49.53 v25.76,57.61 | v18.03,59.08 17.93,59.18 17.93,67.87 19.25,69.19 19.25,72.39 X2.2
  Bottom 0.254: v7.37,65.89 8.89,67.41 14.28,67.41 15.44,68.58 15.44,70.71 17.53,70.71 19.2,72.39 X2.2 | v15.9,33.88 18.09,36.07 21.69,36.07 23.62,38 v25.15,38 | v25.76,57.61 25.76,59.08 v18.03,59.08
D32  (via drill 0.61)
  Top 0.254: v9.45,21.95 10.31,22.81 10.31,23.32 11.28,24.28 12.85,24.28 12.85,26.16 13.97,27.28 XIOH.6
  Bottom 0.254: v9.45,21.95 6.3,21.95 5.08,20.73 X1.11
D33  (via drill 0.61)
  Top 0.254: v10.21,46.63 10.21,38.35 8.89,37.03 v8.89,27.94 | v8.28,68.73 8.23,68.68 v8.23,50.49
  Bottom 0.254: v10.21,46.63 9.04,47.8 5.59,47.8 X1.1 5.03,48.41 3.15,48.41 3.15,49.63 3.66,50.14 7.87,50.14 v8.23,50.49 | XIOH.5 v8.89,27.94 | X2.1 13.72,69.65 9.2,69.65 v8.28,68.73
D34  (via drill 0.61)
  Top 0.254: 7.52,17.22 5.79,17.22 5.08,17.93 X1.12 | v7.52,29.01 7.52,17.22 | v73.56,41.3 72.14,39.88 v72.14,29.87 | v34.65,26.92 35.05,26.52 35.05,14.28 35.41,13.92 v35.41,9.6 | 7.52,17.22 v7.52,11.79
  Bottom 0.254: v7.52,29.01 10.11,31.6 12.34,31.6 13.46,30.48 XIOH.4 | v73.56,41.3 84.68,41.3 84.68,52.48 86.51,56.84 86.87,58.88 89.92,59.69 89.81,65.79 88.65,66.95 87.17,66.95 87.17,68.68 87.88,69.39 88.29,69.39 88.29,74.88 X3.9 | v72.14,29.87 69.95,27.69 45.57,27.69 43.08,25.2 36.37,25.2 v34.65,26.92 | v35.41,9.6 34.54,8.74 12.39,8.74 9.35,11.79 v7.52,11.79
D35  (via drill 0.61)
  Top 0.254: v8.69,46.94 9.86,48.11 9.86,57 | 9.86,57 9.86,57.4 9.96,57.51 9.96,58.52 8.69,59.79 8.69,67.92 14.53,73.76 14.53,74.93 15.65,76.05 20.57,76.05 20.57,74.93 X2.15 | v19.41,29.36 19,29.77 19,56.13 v19.86,57 | v9.96,57 9.86,57
  Bottom 0.254: v8.69,46.94 6.25,44.5 5.28,44.5 4.32,43.54 3.15,43.54 2.54,44.15 X1.15 | XIOH.3 12.55,29.36 v19.41,29.36 | v9.96,57 v19.86,57
D36  (via drill 0.61)
  Top 0.254: v15.44,15.8 20.27,20.62 20.27,32.21 v19.86,32.61 | X2.13 48.77,71.58 v48.77,66.95 | v37.13,65.79 37.54,65.38 37.54,41.91 36.83,41.2 v36.83,37.54
  Bottom 0.254: X1.13 6.15,14.12 14.43,14.12 15.44,15.14 v15.44,15.8 | XIOH.2 19.46,33.02 v19.86,32.61 19.96,32.66 21.34,34.04 23.01,34.04 25.2,36.22 35.51,36.22 v36.83,37.54 | v48.77,66.95 47.6,65.79 v37.13,65.79
D37  (via drill 0.61)
  Top 0.254: v6.35,39.27 6.96,38.66 v6.96,34.9 | v5.69,52.22 1.47,48.01 1.47,42.47 X1.16
  Bottom 0.254: X1.16 4.01,39.93 4.01,39.47 4.17,39.47 4.67,38.96 6.04,38.96 v6.35,39.27 | v6.96,34.9 8.84,33.02 XIOH.1 | X2.16 21.95,73.51 13.31,73.51 9.91,70.1 8.43,70.1 6.04,67.72 6.04,56.9 6.55,56.39 6.55,52.22 v5.69,52.22
D38  (via drill 0.61)
  Top 0.254: v8.84,23.42 9.09,23.67 9.09,26.92 9.86,27.69 9.86,33.02 11.28,34.44 13.16,34.44 13.16,34.75 XIOL.16
  Bottom 0.254: X1.23 2.85,22.4 7.82,22.4 v8.84,23.42
D39  (via drill 0.61)
  Top 0.254: v38,41.15 38,68.38 v39.32,69.7
  Bottom 0.254: XIOL.15 12.55,34.44 15.24,34.44 17.32,36.52 20.27,36.52 24.84,41.1 29.72,41.1 30.07,40.74 37.59,40.74 v38,41.15 | v39.32,69.7 40.89,71.27 45.67,71.27 46.79,72.39 X2.12
D40  (via drill 0.61)
  Top 0.254: v9.96,25.2 10.31,25.55 10.31,30.94 11.28,31.9 12.85,31.9 12.85,33.48 13.82,34.44 15.09,34.44 15.09,36.98 XIOL.14
  Bottom 0.254: X1.22 2.9,25.2 v9.96,25.2
D41  (via drill 0.61)
  Top 0.254: v20.83,42.22 21.69,43.08 21.69,55.98 v23.06,57.35 | v24.64,58.22 25.55,59.13 v25.55,64.16 | v42.77,66.95 44.04,68.22 44.04,72.39 X2.11
  Bottom 0.254: XIOL.13 12.39,39.06 13.36,39.06 13.82,39.52 18.14,39.52 v20.83,42.22 | v23.06,57.35 23.93,58.22 v24.64,58.22 | v25.55,64.16 27.53,66.14 33.73,66.14 34.95,67.36 42.37,67.36 v42.77,66.95
D42  (via drill 0.61)
  Top 0.254: v1.98,40.03 1.47,39.52 1.47,28.7 2.54,27.64 X1.21
  Bottom 0.254: v1.98,40.03 2.29,39.73 3.1,39.73 4.42,38.41 10.16,38.41 11.28,39.52 12.85,39.52 XIOL.12
D43  (via drill 0.61)
  Top 0.254: v9.35,40.79 8.69,41.45 v8.69,42.52 | v6.5,42.88 4.98,44.4 v3.96,44.4 | v63.14,56.03 63.55,56.44 63.55,68.73 v66.19,71.37
  Bottom 0.254: XIOL.11 11.28,40.79 v9.35,40.79 | v8.69,42.52 8.33,42.88 v6.5,42.88 | v3.96,44.4 2.49,45.87 2.13,45.87 1.47,46.53 1.47,51.36 10.41,51.36 10.97,51.92 14.43,51.92 15.54,50.8 25.7,50.8 27.33,49.17 40.44,49.17 41.05,49.78 47.75,49.78 54,56.03 v63.14,56.03 | v66.19,71.37 68.12,73.3 77.37,73.3 78.59,72.08 X3.5
D44  (via drill 0.61)
  Top 0.254: X1.20 4.01,31.85 v4.01,41.15
  Bottom 0.254: v4.01,41.15 4.52,41.66 10.87,41.66 11.28,42.06 12.85,42.06 XIOL.10
D45  (via drill 0.61)
  Top 0.254: v32.61,43.74 32.97,43.38 32.97,11.68 v34.19,10.46
  Bottom 0.254: XIOL.9 12.24,43.99 13.21,43.99 13.51,44.3 26.36,44.3 26.92,43.74 v32.61,43.74 | v34.19,10.46 46.48,10.46 X4.4
D46  (via drill 0.61)
  Top 0.254: v19.86,45.16 v19.86,38.46
  Bottom 0.254: X1.19 4.01,34.59 4.01,35.76 10.06,35.76 11.28,36.98 18.39,36.98 v19.86,38.46 | v19.86,45.16 19.3,45.72 XIOL.8
D47  (via drill 0.61)
  Top 0.254: XIOL.7 11.84,45.31 11.84,44.35 12.85,43.33 12.85,42.72 13.82,41.76 16.76,41.76 v16.76,30.89
  Bottom 0.254: v16.76,30.89 16.87,30.79 20.07,30.79 21.79,29.06 26.36,29.06 27.03,28.4 30.73,28.4 36.42,22.71 82.5,22.71 83.41,23.62 84.12,23.62 84.63,23.11 84.63,16.46 82.96,16.46 80.42,13.92 80.42,10.06 82.4,10.06 86.56,5.89 X5.4
D48  (via drill 0.61)
  Top 0.254: XIOL.6 16.41,48.26 v16.41,51.66 | v27.69,51.26 28.25,50.7 28.25,47.09 31.29,44.04 31.29,30.58 30.89,30.18 30.89,29.46 v32.11,28.25 | v84.68,34.44 85.6,35.36 85.6,61.52 87.43,63.35 90.73,63.35 90.73,71.37 90.93,71.58 v90.93,74.73
  Bottom 0.254: v16.41,51.66 16.82,51.26 v27.69,51.26 | v32.11,28.25 37.19,23.16 64.26,23.16 66.75,25.65 71.83,25.65 74.37,28.19 76.3,28.19 82.55,34.44 v84.68,34.44 | v90.93,74.73 89.05,76.61 86.87,76.61 85.55,75.29 X3.10
D49
  Bottom 0.254: IC3.2 15.54,48.26 14.43,49.38 12.55,49.38 XIOL.5
D51  (via drill 0.61)
  Top 0.254: v41.2,39.52 41.2,39.93 IC3.4 44.5,43.28 44.5,44.2 47.65,44.2 49.28,45.82 49.28,49.28 v50.14,50.14 | XIOL.3 12.85,52.22 15.29,52.22 v15.29,52.27 | v35.31,46.08 v35.31,50.04 | v84.33,59.99 84.33,66.8 85.75,68.22 ICSP.4
  Bottom 0.254: v41.2,39.52 41.2,39.06 40.69,38.56 40.69,35.56 ICSP1.4 | v50.14,50.14 50.49,49.78 62.48,49.78 IC2.4 63.6,50.75 75.08,50.75 v84.33,59.99 | v15.29,52.27 16.15,53.14 28.7,53.14 28.85,53.29 32.16,53.29 33.22,52.22 33.22,49.94 35.2,49.94 v35.31,50.04 | v35.31,46.08 37.9,43.48 44.15,43.48 IC3.4
D52  (via drill 0.61)
  Top 0.254: v47.7,41.76 45.41,39.47 45.41,36.63 44.35,35.56 ICSP1.3 | v39.32,52.43 38.91,52.02 38.91,45.36 v39.93,44.35 | IC3.3 v47.4,48.67
  Bottom 0.254: ICSP.3 85.75,65.68 85.75,60.2 75.84,50.29 65.53,50.29 IC2.3 63.4,48.31 62.43,49.28 48.01,49.28 v47.4,48.67 | 45.39,44.78 47.7,42.47 v47.7,41.76 | 45.39,44.78 IC3.3 | XIOL.2 14.22,53.59 28.5,53.59 28.65,53.75 38,53.75 v39.32,52.43 | v39.93,44.35 40.28,44.7 45.31,44.7 45.39,44.78
D53  (via drill 0.61)
  Top 0.254: v15.54,49.48 10.31,49.48 10.31,52.22 XIOL.1
  Bottom 0.254: IC2.2 61.98,47.24 47.55,47.24 45.52,49.28 41.2,49.28 40.64,48.72 16.31,48.72 v15.54,49.48
DA
  Top 0.254: C3.1 68.99,22.45 68.99,27.53 IC1.5 67.21,29.26 67,29.26 R6.1
DACA  (via drill 0.61)
  Top 0.254: v68.73,48.87 68.73,73.71 71.17,76.15 73.2,76.15 73.2,74.42 73.97,73.66 79.96,73.66 79.96,74.88 X3.12
  Bottom 0.254: IC2.8 56.29,43.59 60.3,43.59 61.42,44.7 64.57,44.7 v68.73,48.87
DACB  (via drill 0.61)
  Top 0.254: IC2.6 60.05,52.43 v60.05,70.21
  Bottom 0.254: v60.05,70.21 60.45,69.8 72.24,69.8 73.25,70.81 79.1,70.81 79.86,71.58 79.86,73.66 78.49,73.66 77.27,74.88 X3.13
DACC  (via drill 0.61)
  Top 0.254: IC3.8 50.39,49.12 v50.39,44.55 | v50.39,41.76 50.95,41.2 50.95,8.74 X4.3
  Bottom 0.254: v50.39,41.76 v50.39,44.55
DACD  (via drill 0.61)
  Top 0.254: v57.2,44.45 59.94,41.71 59.94,39.22 60.45,38.71 60.45,14.28 61.11,13.61 v61.11,10.92
  Bottom 0.254: IC3.6 53.34,44.45 v57.2,44.45 | v61.11,10.92 62.89,9.14 80.57,9.14 83.82,5.89 X5.3
DB
  Bottom 0.254: IC1.9 C4.1 R5.1
FUEL  (via drill 0.61)
  Top 0.254: X1.14 4.01,48.41 v4.01,49.28 | v39.78,47.4 40.59,48.21 40.59,50.65 44.65,54.71 44.65,58.42 43.33,59.74 43.33,63.35 v44.81,64.82
  Bottom 0.254: v4.01,49.28 4.12,49.38 8.74,49.38 10.97,47.14 15.85,47.14 16.51,47.8 39.37,47.8 v39.78,47.4 | v44.81,64.82 45.21,65.23 72.19,65.23 72.29,65.13 81.08,65.13 83.11,67.16 83.72,67.16 84.63,68.07 84.63,70.81 85.65,71.83 85.65,73.66 86.06,73.66 87.07,74.68 87.07,76.15 88.85,76.15 89.66,75.34 89.66,72.08 X3.1
GND  (via drill 0.7)
  Top 0.152: U$2.PIN3 34.29,57.61 34.29,51.97 U$2.PIN6
  Top 0.813: D1.C v22.86,55.88 | v34.04,44.96 34.04,51.4 U$2.PIN6 | IC2.5 IC3.7 IC2.7 | IC2.7 IC3.5 51.82,43.43 47.75,43.43 45.21,40.89 44.7,40.89 41.91,38.1 ICSP1.6 | 60.96,45.21 C2.2 61.21,40.39 61.21,26.67 IC1.6 IC1.7 64.26,21.08 64.26,11.43 60.45,7.62 X4.1 | 60.96,45.21 v60.96,57.15 | C3.2 IC1.8 | X5.1 78.28,6.66 81.53,9.65 PWMH.7 | IC2.7 60.45,45.72 60.96,45.21 | v67.31,77.22 POWER.4 67.31,60.71
  Bottom 0.152: 90.17,31.04 90.42,31.5
  Bottom 0.254: PWMH.7 85.09,16.26 85.09,24.08 83.31,24.08 83.03,24.36
  Bottom 0.813: v22.86,55.88 JP3.1 JP4.1 | D1.C 27.3,45.72 JP5.1 33.92,45.07 v34.04,44.96 | U$2.PIN6 34.55,51.31 41.91,51.31 45.21,54.61 C1.2 49.28,57.15 v60.96,57.15 64.77,57.15 R4.2 POWER.4 POWER.5 | IC1.8 IC1.7 | 74.93,23.88 IC1.8 | X1.25 2.54,14.48 7.37,9.65 10.41,9.65 12.24,7.83 U$1.PIN3 U$1.PIN6 18.29,7.62 18.28,7.62 U$1.PIN6 19.34,7.58 21.84,5.08 27.87,5.08 JP6.2 32.77,5 | ICSP.6 88.63,68.58 92.46,68.58 92.46,78.49 82.77,78.49 | 82.77,78.49 82.68,78.49 | 82.68,78.49 82.77,77 X3.11 82.77,78.49 | X2.25 48.26,74.93 48.26,78.49 67.18,78.49 | 67.18,78.49 82.68,78.49 | 32.77,5 32.77,4.83 | 32.77,5 32.77,5.08 36.58,3.05 57.56,3.05 X4.1 | 67.18,78.49 v67.31,77.22 | IC1.8 C4.2 82.8,24.13 83.03,24.36 85.34,26.67 95.25,26.67
  Bottom 1.016: Q1.3 95.25,36.07 95,35.81 | 95,35.81 92.96,33.78 | 92.96,33.78 92.71,33.78 90.42,31.5 90.68,31.5 92.96,33.78 | 95,35.81 95,36.58 95.5,37.08 97.03,37.08 97.03,28.45 95.25,26.67 | Q2.3 90.17,31.04
N$1  (via drill 0.61)
  Top 0.254: v74.57,63.25 75.08,63.25 75.08,63.14 78.38,59.84 78.38,56.84 80.26,54.97 80.26,28.96 80.11,28.8 80.11,9.55 77.01,6.45 77.01,5.33 79.3,3.05 79.65,3.05 X5.6
  Bottom 0.254: ADCL.3 55.42,64.31 71.78,64.31 72.85,63.25 v74.57,63.25
N$2
  Bottom 0.254: IC1.1 68.73,37.95 84.48,37.95
  Bottom 0.305: R7.1 90.17,33.27 90.17,33.78 91.44,35.05 91.44,39.12 85.65,39.12 84.48,37.95
N$3
  Bottom 0.305: R7.2 95.12,30.48 Q2.1
N$4
  Bottom 0.305: IC1.13 86.34,36.83 R3.2
N$5  (via drill 0.61)
  Top 0.254: ADCH.1 34.44,61.11 v34.44,69.7
  Bottom 0.254: v34.44,69.7 36.02,71.27 37.39,71.27 38.51,72.39 X2.9
N$6
  Top 0.254: R2.2 12.19,2.54 U$1.PIN1 12.34,2.59 18.24,2.59 U$1.PIN4
N$7
  Top 0.254: IC1.2 R6.2
N$8  (via drill 0.61)
  Top 0.254: ADCL.4 48.41,59.84 v48.41,46.18 | v48.87,42.27 49.43,41.71 49.43,14.94 48.41,13.92 48.41,10.11 50.95,7.57 50.95,6.4 52.32,5.03 52.32,4.62 55.68,1.27 83.97,1.27 83.97,3.5 85.04,4.57 89.36,4.57 X5.5
  Bottom 0.254: v48.41,46.18 48.41,42.27 v48.87,42.27
N$9  (via drill 0.61)
  Top 0.254: v24.89,49.89 25.15,49.63 v25.15,39.22 | v83.41,53.54 83.41,65.53 83.26,65.68 ICSP.1 | v70.71,35.51 v70.71,40.84
  Bottom 0.254: XIOL.4 14.43,50.34 24.43,50.34 v24.89,49.89 | v25.15,39.22 25.81,38.56 37.03,38.56 41.45,34.14 43.18,34.14 44.3,33.02 ICSP1.1 44.4,33.12 68.33,33.12 v70.71,35.51 | v70.71,40.84 v83.41,53.54
N$26
  Bottom 0.254: JP6.1 27.94,7.52 27.43,7.01 22.91,7.01 ANT1.1
N$28  (via drill 0.61)
  Top 0.152: U$2.PIN5 U$2.PIN2
  Top 0.254: U$2.PIN5 v31.75,29.82
  Bottom 0.254: v31.75,29.82 27.99,29.82 JP5.7
N$33
  Bottom 0.305: R3.1 86.61,33.27 Q1.1
N$40
  Top 0.254: D1.A R8.1
RA
  Top 0.254: C5.2 69.6,54.36 69.6,34.04 IC1.4
  Bottom 0.254: R4.1 67.31,54.61 C5.2 | IC1.4 68.22,32.66 73.76,32.66 73.86,32.77 76,32.77 76.61,32.16 76.61,29.21 IC1.10
RCVR5  (via drill 0.61)
  Top 0.254: v25.7,28.19 26.06,28.55 26.06,33.02 JP5.5
  Bottom 0.254: R8.2 23.11,28.19 v25.7,28.19
RESET  (via drill 0.61)
  Top 0.254: U$1.PIN2 U$1.PIN5 18.29,5.18 19.91,6.81 19.91,10.01 20.47,10.57 21.84,10.57 v21.84,10.46 | v73,36.17 73.25,36.42 73.25,37.24 74.37,38.35 76.61,38.35 76.61,56.49 74.68,58.42 74.68,60.71 POWER.1 | v48.56,15.95 48.46,16.05 48.46,30.43 44.45,34.44 43.23,34.44 43.23,37.03 44.3,38.1 ICSP1.5
  Bottom 0.254: v73,36.17 72.8,36.37 70.36,36.37 69.8,35.81 66.75,35.81 64.82,33.88 48.56,33.88 44.35,38.1 ICSP1.5 | POWER.1 74.98,61.01 84.33,61.01 84.33,65.84 85.34,66.85 86.21,66.85 86.56,66.5 87.53,66.5 88.29,65.73 ICSP.5 | v21.84,10.46 23.01,11.63 23.01,15.95 v48.56,15.95
WL2  (via drill 0.61)
  Top 0.254: JP9.4 15.29,64.72 15.29,54 17.63,51.66 17.63,28.91 v17.22,28.5
  Bottom 0.254: v17.22,28.5 18.8,26.92 27.58,26.92 JP5.8
WLES  (via drill 0.7)
  Top 0.813: X3.6 75.82,71.85 75.82,65.15 82.3,58.55 v82.3,40.39
  Bottom 0.813: v82.3,40.39 91.95,40.39 92.71,39.62 Q1.2
WLXCOLL  (via drill 0.7)
  Top 0.254: 81.03,57.76 81.03,58.17
  Top 0.813: v72.64,66.04 73.41,66.04 74.17,65.28 81.03,58.17 80.77,58.42 | 81.03,57.91 81.03,57.76 v81.03,28.45
  Bottom 0.813: JP9.1 63.25,68.58 65.79,66.04 v72.64,66.04 | v81.03,28.45 81.79,27.94 92.71,27.94 Q2.2
X2-14
  Top 0.813: JP9.3 15.62,74.93 X2.14
~QB
  Bottom 0.254: R5.2 IC1.12

## Text on the board
tNames: 1.0 | MegaShieldDB | Made in USA